# Altium PCB PCB1.pcbdoc
Units mil, origin at the board's own origin, x right, y up, seen from the top; angles counter-clockwise.
Board outline 1070.8 x 1094.5 mil, 2 copper layers (Top Layer, Bottom Layer), stack 62.2 mil thick; 25 components, 18 nets, 96 pads, 48 vias.
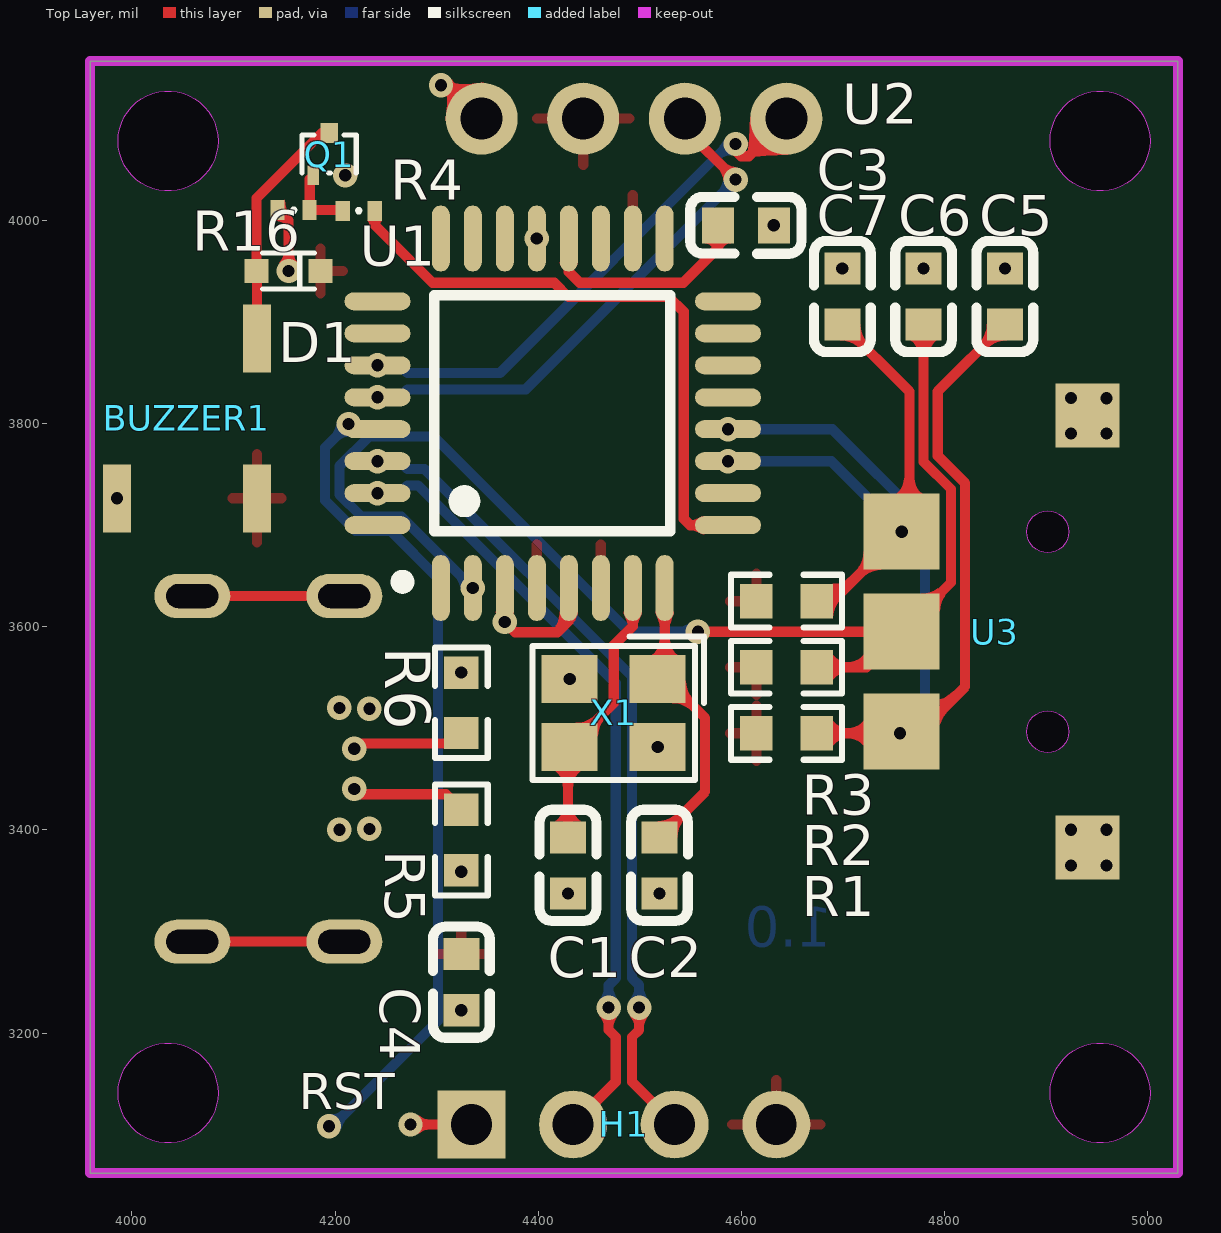
[diagram p0: Top Layer view]
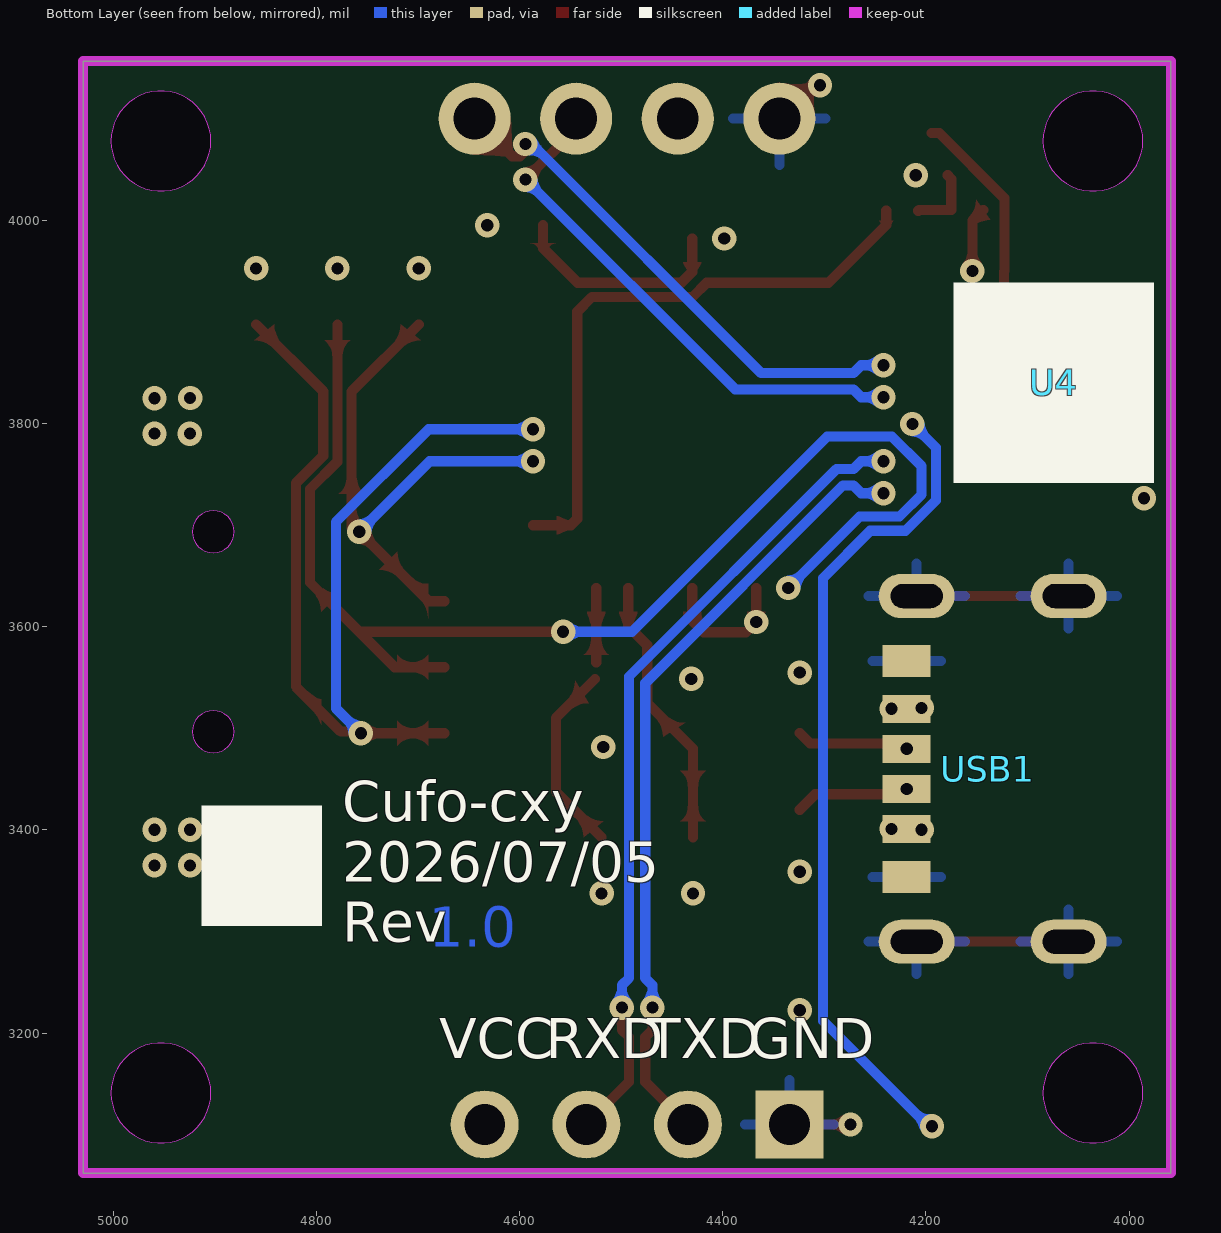
[diagram p1: Bottom Layer view, seen from below]

## Layer stack, top to bottom
Top Solder Mask Layer: solder mask 0.4, Dk 3.3
Top Layer: signal copper 1.4
Dielectric1: surface 59.4, FR4, Dk 4.5
Bottom Layer: signal copper 1.4
Bottom Solder Mask Layer: solder mask 0.4, Dk 3.3

## Board outline
3958.8,4156.7 3958.8,3062.2 5029.6,3062.2 5029.6,4156.7

## Design rules (kind name [scope] priority, off if disabled: settings)
BoardOutlineClearance copperThickness1oz [All] p0: genericclearance=10 ignorepadtopadclearanceinfootprint=FALSE except(0: Arc-SplitContinuation Track-SplitContinuation SMDPad-SplitContinuation THPad-SplitContinuation Via-SplitContinuation Fill-SplitContinuation Poly-SplitContinuation Region-SplitContinuation Text-SplitContinuation)
BoardOutlineClearance copperThickness2oz [All] p0: genericclearance=10 ignorepadtopadclearanceinfootprint=FALSE except(0: Arc-SplitContinuation Track-SplitContinuation SMDPad-SplitContinuation THPad-SplitContinuation Via-SplitContinuation Fill-SplitContinuation Poly-SplitContinuation Region-SplitContinuation Text-SplitContinuation)
BoardOutlineClearance otherClearance [All] p0: genericclearance=10 ignorepadtopadclearanceinfootprint=FALSE except(0: Arc-SplitContinuation Track-SplitContinuation SMDPad-SplitContinuation THPad-SplitContinuation Via-SplitContinuation Fill-SplitContinuation Poly-SplitContinuation Region-SplitContinuation Text-SplitContinuation)
Clearance copperThickness1oz [All] p1: gap=7 ignorepadtopadclearanceinfootprint=FALSE
Clearance copperThickness2oz [All] p1: gap=7 ignorepadtopadclearanceinfootprint=FALSE
Clearance otherClearance [All] p1: gap=7 ignorepadtopadclearanceinfootprint=FALSE
DiffPairsRouting differentialPair [All] p1: maxuncoupledlength=10 minlimit=6 maxlimit=Infinity mostfreqgap=6 toplayer_minwidth=5 toplayer_prefwidth=10 toplayer_maxwidth=100 bottomlayer_minwidth=5 bottomlayer_prefwidth=10 bottomlayer_maxwidth=100
PasteMaskExpansion pasteMaskExpansion [All] p1: expansion=0
PlaneConnect innerPlane [All] p1: planeconnectstyle=Relief reliefexpansion=20 reliefentries=4 reliefconductorwidth=10 reliefairgap=10
PolygonConnect copperRegion [All] p1: connectstyle=Relief reliefentries=4 reliefconductorwidth=10 polygonreliefangle="90 Angle" airgapwidth=10
RoutingVias viaSize [All] p1: viastyle="Through Hole" holewidth=12.0078 minholewidth=11.811 maxholewidth=248.0314 width=12.0078 minwidth=11.811 maxwidth=248.0314
SolderMaskExpansion solderMaskExpansion [IsVia] p1: useseparateexpansions=TRUE expansion=-1000 expansionbottom=-1000
SolderMaskExpansion solderMaskExpansion [All] p2: useseparateexpansions=TRUE expansion=2 expansionbottom=2
Width copperThickness1oz [All] p1: maxlimit=100 minlimit=5 preferedwidth=10
Width copperThickness2oz [All] p1: maxlimit=100 minlimit=8 preferedwidth=10

## Components (designator, comment, footprint, x,y, rotation, side; value= is the part's Value field where it differs from the comment)
BUZZER1 "4kHz" BUZ-SMD_L5.0-W5.5-P4.60 4054.2,3805 r90 top
C1 "22pF" C0603#1 4429.2,3365 r90 top
C2 "22pF" C0603#1 4519.2,3365 r90 top
C3 "100nF" C0603#2 4604.2,3995 r0 top
C4 "100nF" C0603#1 4324.2,3250 r270 top
C5 "100nF" C0603#1 4859.2,3925 r270 top
C6 "100nF" C0603#1 4779.2,3925 r270 top
C7 "100nF" C0603#1 4699.2,3925 r270 top
D1 "1N4148WT" SOD-523_L1.2-W0.8-LS1.6-FD 4154.2,3950 r0 top
H1 "A254UP-ZD04P" HDR-TH_A254UP-ZD04P 4484.2,3110 r0 top
Q1 "2SC5658" SOT-723_L1.2-W0.8-P0.80-LS1.2-BR 4194.2,4065 r270 top
R1 "5.1kΩ" R0603#1 4644.2,3495 r180 top
R2 "5.1kΩ" R0603#1 4644.2,3560 r180 top
R3 "5.1kΩ" R0603#1 4644.2,3625 r180 top
R4 "1K" R0402_无丝印#1 4223.3,4009.4 r180 top
R5 "5.1kΩ" R0603#2 4324.2,3390 r90 top
R6 "5.1kΩ" R0603#2 4324.2,3525 r90 top
R16 "10K" R0402_无丝印#2 4159.2,4010 r0 top
RST "" Test-Point-0.5mm 4194,3108.2 r0 top
U1 "ATMEGA328P-AU" TQFP-32_L7.0-W7.0-P0.80-LS9.0-BL 4414.2,3810 r0 top
U2 "HS96L03W2C03" OLED-TH_L27.8-W27.2-P2.54_C9900033791 4494.2,4100 r0 top
U3 "BL-DT" SW-SMD_BL-DT 4849.2,3595 r270 top
U4 "" JLC-QRCODE-5x5 4074.2,3840 r180 bottom
USB1 "TYPE-C 6P" TYPE-C-SMD_TYPE-C-6P_1 4139.2,3460 r90 bottom
X1 "16MHz" CRYSTAL-SMD_4P-L3.2-W2.5-BL 4474.2,3515 r180 top

## Footprints (in the part's own frame and the unit in brackets; to place one, negate y for a bottom-side part, rotate by r counter-clockwise, add the part's x,y. Pads: shape width x height; smd on the part's side, far side on the other; paste and mask are expansions set on the pad)
BUZ-SMD_L5.0-W5.5-P4.60 [mil]
  rect 66.9x27.6 smd: 1(-78.7,-68.9) 2(78.7,-68.9) 3(-78.7,68.9)
C0603#1 [mil]
  rect 31.5x35.4 smd: 1(-27.6,0) 2(27.6,0)
  silkscreen extent -55,-28 55,28
C0603#2 [mil]
  rect 31.5x35.4 smd: 1(-27.5,0) 2(27.6,0)
  silkscreen extent -55,-28 55,28
CRYSTAL-SMD_4P-L3.2-W2.5-BL [mil]
  rect 55.1x47.2 smd: 1(-43.3,-33.5) 2(43.3,-33.5) 3(43.3,33.5) 4(-43.3,33.5)
  silkscreen extent -89,-75 80,66
HDR-TH_A254UP-ZD04P [mil]
  rect 66.9x66.9 hole 40.2: 1(-150,0)
  round 66.9 hole 40.2: 2(-50,0) 3(50,0) 4(150,0)
JLC-QRCODE-5x5 [mil]
  silkscreen extent -98,-98 98,98
OLED-TH_L27.8-W27.2-P2.54_C9900033791 [mil]
  round 70.9 hole 41.3 paste+0 mask+2: 1(-150,0) 2(-50,0) 3(50,0) 4(150,0)
  Board Outline Layer lines w0.1: -507.9,-959.1 -507.5,-965.2 -506.3,-971.3 -504.4,-977.2 -501.8,-982.8 -498.5,-988 -494.5,-992.7 -490,-997 -485,-1000.6 -479.6,-1003.6 -473.9,-1005.9 -467.9,-1007.4 -461.7,-1008.2 -455.6,-1008.2 -449.4,-1007.4 -443.4,-1005.9 -437.7,-1003.6 -432.3,-1000.6 -427.3,-997 -422.8,-992.7 -418.8,-988 -415.5,-982.8 -412.9,-977.2 -411,-971.3 -409.8,-965.2 -409.4,-959.1 -409.8,-952.9 -411,-946.8 -412.9,-940.9 -415.5,-935.3 -418.8,-930.1 -422.8,-925.4 -427.3,-921.1 -432.3,-917.5 -437.7,-914.5 -443.4,-912.2 -449.4,-910.7 -455.6,-909.9 -461.7,-909.9 -467.9,-910.7 -473.9,-912.2 -479.6,-914.5 -485,-917.5 -490,-921.1 -494.5,-925.4 -498.5,-930.1 -501.8,-935.3 -504.4,-940.9 -506.3,-946.8 -507.5,-952.9 -507.9,-959.1 ; -507.9,-22.1 -507.5,-28.2 -506.3,-34.3 -504.4,-40.2 -501.8,-45.8 -498.5,-51 -494.5,-55.7 -490,-60 -485,-63.6 -479.6,-66.6 -473.9,-68.9 -467.9,-70.4 -461.7,-71.2 -455.6,-71.2 -449.4,-70.4 -443.4,-68.9 -437.7,-66.6 -432.3,-63.6 -427.3,-60 -422.8,-55.7 -418.8,-51 -415.5,-45.8 -412.9,-40.2 -411,-34.3 -409.8,-28.2 -409.4,-22.1 -409.8,-15.9 -411,-9.8 -412.9,-3.9 -415.5,1.7 -418.8,6.9 -422.8,11.6 -427.3,15.9 -432.3,19.5 -437.7,22.5 -443.4,24.8 -449.4,26.3 -455.6,27.1 -461.7,27.1 -467.9,26.3 -473.9,24.8 -479.6,22.5 -485,19.5 -490,15.9 -494.5,11.6 -498.5,6.9 -501.8,1.7 -504.4,-3.9 -506.3,-9.8 -507.5,-15.9 -507.9,-22.1 ; 409.5,-959.1 409.8,-965.2 411,-971.3 412.9,-977.2 415.5,-982.8 418.9,-988 422.8,-992.7 427.3,-997 432.3,-1000.6 437.7,-1003.6 443.5,-1005.9 449.5,-1007.4 455.6,-1008.2 461.8,-1008.2 467.9,-1007.4 473.9,-1005.9 479.6,-1003.6 485,-1000.6 490,-997 494.5,-992.7 498.5,-988 501.8,-982.8 504.4,-977.2 506.3,-971.3 507.5,-965.2 507.9,-959.1 507.5,-952.9 506.3,-946.8 504.4,-940.9 501.8,-935.3 498.5,-930.1 494.5,-925.4 490,-921.1 485,-917.5 479.6,-914.5 473.9,-912.2 467.9,-910.7 461.8,-909.9 455.6,-909.9 449.5,-910.7 443.5,-912.2 437.7,-914.5 432.3,-917.5 427.3,-921.1 422.8,-925.4 418.9,-930.1 415.5,-935.3 412.9,-940.9 411,-946.8 409.8,-952.9 409.5,-959.1 ; 409.5,-22.1 409.8,-28.2 411,-34.3 412.9,-40.2 415.5,-45.8 418.9,-51 422.8,-55.7 427.3,-60 432.3,-63.6 437.7,-66.6 443.5,-68.9 449.5,-70.4 455.6,-71.2 461.8,-71.2 467.9,-70.4 473.9,-68.9 479.6,-66.6 485,-63.6 490,-60 494.5,-55.7 498.5,-51 501.8,-45.8 504.4,-40.2 506.3,-34.3 507.5,-28.2 507.9,-22.1 507.5,-15.9 506.3,-9.8 504.4,-3.9 501.8,1.7 498.5,6.9 494.5,11.6 490,15.9 485,19.5 479.6,22.5 473.9,24.8 467.9,26.3 461.8,27.1 455.6,27.1 449.5,26.3 443.5,24.8 437.7,22.5 432.3,19.5 427.3,15.9 422.8,11.6 418.9,6.9 415.5,1.7 412.9,-3.9 411,-9.8 409.8,-15.9 409.5,-22.1
  Board Outline Layer region: -409.4,-22.1 -409.8,-28.2 -411,-34.3 -412.9,-40.2 -415.5,-45.8 -418.8,-51 -422.8,-55.7 -427.3,-60 -432.3,-63.6 -437.7,-66.6 -443.4,-68.9 -449.4,-70.4 -455.6,-71.2 -461.7,-71.2 -467.9,-70.4 -473.9,-68.9 -479.6,-66.6 -485,-63.6 -490,-60 -494.5,-55.7 -498.5,-51 -501.8,-45.8 -504.4,-40.2 -506.3,-34.3 -507.5,-28.2 -507.9,-22.1 -507.5,-15.9 -506.3,-9.8 -504.4,-3.9 -501.8,1.7 -498.5,6.9 -494.5,11.6 -490,15.9 -485,19.5 -479.6,22.5 -473.9,24.8 -467.9,26.3 -461.7,27.1 -455.6,27.1 -449.4,26.3 -443.4,24.8 -437.7,22.5 -432.3,19.5 -427.3,15.9 -422.8,11.6 -418.8,6.9 -415.5,1.7 -412.9,-3.9 -411,-9.8 -409.8,-15.9
  Board Outline Layer region: -409.4,-22.1 -409.8,-28.2 -411,-34.3 -412.9,-40.2 -415.5,-45.8 -418.8,-51 -422.8,-55.7 -427.3,-60 -432.3,-63.6 -437.7,-66.6 -443.4,-68.9 -449.4,-70.4 -455.6,-71.2 -461.7,-71.2 -467.9,-70.4 -473.9,-68.9 -479.6,-66.6 -485,-63.6 -490,-60 -494.5,-55.7 -498.5,-51 -501.8,-45.8 -504.4,-40.2 -506.3,-34.3 -507.5,-28.2 -507.9,-22.1 -507.5,-15.9 -506.3,-9.8 -504.4,-3.9 -501.8,1.7 -498.5,6.9 -494.5,11.6 -490,15.9 -485,19.5 -479.6,22.5 -473.9,24.8 -467.9,26.3 -461.7,27.1 -455.6,27.1 -449.4,26.3 -443.4,24.8 -437.7,22.5 -432.3,19.5 -427.3,15.9 -422.8,11.6 -418.8,6.9 -415.5,1.7 -412.9,-3.9 -411,-9.8 -409.8,-15.9
  Board Outline Layer region: 507.9,-22.1 507.5,-28.2 506.3,-34.3 504.4,-40.2 501.8,-45.8 498.5,-51 494.5,-55.7 490,-60 485,-63.6 479.6,-66.6 473.9,-68.9 467.9,-70.4 461.8,-71.2 455.6,-71.2 449.5,-70.4 443.5,-68.9 437.7,-66.6 432.3,-63.6 427.3,-60 422.8,-55.7 418.9,-51 415.5,-45.8 412.9,-40.2 411,-34.3 409.8,-28.2 409.5,-22.1 409.8,-15.9 411,-9.8 412.9,-3.9 415.5,1.7 418.9,6.9 422.8,11.6 427.3,15.9 432.3,19.5 437.7,22.5 443.5,24.8 449.5,26.3 455.6,27.1 461.8,27.1 467.9,26.3 473.9,24.8 479.6,22.5 485,19.5 490,15.9 494.5,11.6 498.5,6.9 501.8,1.7 504.4,-3.9 506.3,-9.8 507.5,-15.9
  Board Outline Layer region: 507.9,-22.1 507.5,-28.2 506.3,-34.3 504.4,-40.2 501.8,-45.8 498.5,-51 494.5,-55.7 490,-60 485,-63.6 479.6,-66.6 473.9,-68.9 467.9,-70.4 461.8,-71.2 455.6,-71.2 449.5,-70.4 443.5,-68.9 437.7,-66.6 432.3,-63.6 427.3,-60 422.8,-55.7 418.9,-51 415.5,-45.8 412.9,-40.2 411,-34.3 409.8,-28.2 409.5,-22.1 409.8,-15.9 411,-9.8 412.9,-3.9 415.5,1.7 418.9,6.9 422.8,11.6 427.3,15.9 432.3,19.5 437.7,22.5 443.5,24.8 449.5,26.3 455.6,27.1 461.8,27.1 467.9,26.3 473.9,24.8 479.6,22.5 485,19.5 490,15.9 494.5,11.6 498.5,6.9 501.8,1.7 504.4,-3.9 506.3,-9.8 507.5,-15.9
  Board Outline Layer region: -409.4,-959.1 -409.8,-965.2 -411,-971.3 -412.9,-977.2 -415.5,-982.8 -418.8,-988 -422.8,-992.7 -427.3,-997 -432.3,-1000.6 -437.7,-1003.6 -443.4,-1005.9 -449.4,-1007.4 -455.6,-1008.2 -461.7,-1008.2 -467.9,-1007.4 -473.9,-1005.9 -479.6,-1003.6 -485,-1000.6 -490,-997 -494.5,-992.7 -498.5,-988 -501.8,-982.8 -504.4,-977.2 -506.3,-971.3 -507.5,-965.2 -507.9,-959.1 -507.5,-952.9 -506.3,-946.8 -504.4,-940.9 -501.8,-935.3 -498.5,-930.1 -494.5,-925.4 -490,-921.1 -485,-917.5 -479.6,-914.5 -473.9,-912.2 -467.9,-910.7 -461.7,-909.9 -455.6,-909.9 -449.4,-910.7 -443.4,-912.2 -437.7,-914.5 -432.3,-917.5 -427.3,-921.1 -422.8,-925.4 -418.8,-930.1 -415.5,-935.3 -412.9,-940.9 -411,-946.8 -409.8,-952.9
  Board Outline Layer region: -409.4,-959.1 -409.8,-965.2 -411,-971.3 -412.9,-977.2 -415.5,-982.8 -418.8,-988 -422.8,-992.7 -427.3,-997 -432.3,-1000.6 -437.7,-1003.6 -443.4,-1005.9 -449.4,-1007.4 -455.6,-1008.2 -461.7,-1008.2 -467.9,-1007.4 -473.9,-1005.9 -479.6,-1003.6 -485,-1000.6 -490,-997 -494.5,-992.7 -498.5,-988 -501.8,-982.8 -504.4,-977.2 -506.3,-971.3 -507.5,-965.2 -507.9,-959.1 -507.5,-952.9 -506.3,-946.8 -504.4,-940.9 -501.8,-935.3 -498.5,-930.1 -494.5,-925.4 -490,-921.1 -485,-917.5 -479.6,-914.5 -473.9,-912.2 -467.9,-910.7 -461.7,-909.9 -455.6,-909.9 -449.4,-910.7 -443.4,-912.2 -437.7,-914.5 -432.3,-917.5 -427.3,-921.1 -422.8,-925.4 -418.8,-930.1 -415.5,-935.3 -412.9,-940.9 -411,-946.8 -409.8,-952.9
  Board Outline Layer region: 507.9,-959.1 507.5,-965.2 506.3,-971.3 504.4,-977.2 501.8,-982.8 498.5,-988 494.5,-992.7 490,-997 485,-1000.6 479.6,-1003.6 473.9,-1005.9 467.9,-1007.4 461.8,-1008.2 455.6,-1008.2 449.5,-1007.4 443.5,-1005.9 437.7,-1003.6 432.3,-1000.6 427.3,-997 422.8,-992.7 418.9,-988 415.5,-982.8 412.9,-977.2 411,-971.3 409.8,-965.2 409.5,-959.1 409.8,-952.9 411,-946.8 412.9,-940.9 415.5,-935.3 418.9,-930.1 422.8,-925.4 427.3,-921.1 432.3,-917.5 437.7,-914.5 443.5,-912.2 449.5,-910.7 455.6,-909.9 461.8,-909.9 467.9,-910.7 473.9,-912.2 479.6,-914.5 485,-917.5 490,-921.1 494.5,-925.4 498.5,-930.1 501.8,-935.3 504.4,-940.9 506.3,-946.8 507.5,-952.9
  Board Outline Layer region: 507.9,-959.1 507.5,-965.2 506.3,-971.3 504.4,-977.2 501.8,-982.8 498.5,-988 494.5,-992.7 490,-997 485,-1000.6 479.6,-1003.6 473.9,-1005.9 467.9,-1007.4 461.8,-1008.2 455.6,-1008.2 449.5,-1007.4 443.5,-1005.9 437.7,-1003.6 432.3,-1000.6 427.3,-997 422.8,-992.7 418.9,-988 415.5,-982.8 412.9,-977.2 411,-971.3 409.8,-965.2 409.5,-959.1 409.8,-952.9 411,-946.8 412.9,-940.9 415.5,-935.3 418.9,-930.1 422.8,-925.4 427.3,-921.1 432.3,-917.5 437.7,-914.5 443.5,-912.2 449.5,-910.7 455.6,-909.9 461.8,-909.9 467.9,-910.7 473.9,-912.2 479.6,-914.5 485,-917.5 490,-921.1 494.5,-925.4 498.5,-930.1 501.8,-935.3 504.4,-940.9 506.3,-946.8 507.5,-952.9
  Multi-Layer board cut-out: -409.4,-22.1 -409.8,-28.2 -411,-34.3 -412.9,-40.2 -415.5,-45.8 -418.8,-51 -422.8,-55.7 -427.3,-60 -432.3,-63.6 -437.7,-66.6 -443.4,-68.9 -449.4,-70.4 -455.6,-71.2 -461.7,-71.2 -467.9,-70.4 -473.9,-68.9 -479.6,-66.6 -485,-63.6 -490,-60 -494.5,-55.7 -498.5,-51 -501.8,-45.8 -504.4,-40.2 -506.3,-34.3 -507.5,-28.2 -507.9,-22.1 -507.5,-15.9 -506.3,-9.8 -504.4,-3.9 -501.8,1.7 -498.5,6.9 -494.5,11.6 -490,15.9 -485,19.5 -479.6,22.5 -473.9,24.8 -467.9,26.3 -461.7,27.1 -455.6,27.1 -449.4,26.3 -443.4,24.8 -437.7,22.5 -432.3,19.5 -427.3,15.9 -422.8,11.6 -418.8,6.9 -415.5,1.7 -412.9,-3.9 -411,-9.8 -409.8,-15.9
  Multi-Layer board cut-out: 507.9,-22.1 507.5,-28.2 506.3,-34.3 504.4,-40.2 501.8,-45.8 498.5,-51 494.5,-55.7 490,-60 485,-63.6 479.6,-66.6 473.9,-68.9 467.9,-70.4 461.8,-71.2 455.6,-71.2 449.5,-70.4 443.5,-68.9 437.7,-66.6 432.3,-63.6 427.3,-60 422.8,-55.7 418.9,-51 415.5,-45.8 412.9,-40.2 411,-34.3 409.8,-28.2 409.5,-22.1 409.8,-15.9 411,-9.8 412.9,-3.9 415.5,1.7 418.9,6.9 422.8,11.6 427.3,15.9 432.3,19.5 437.7,22.5 443.5,24.8 449.5,26.3 455.6,27.1 461.8,27.1 467.9,26.3 473.9,24.8 479.6,22.5 485,19.5 490,15.9 494.5,11.6 498.5,6.9 501.8,1.7 504.4,-3.9 506.3,-9.8 507.5,-15.9
  Multi-Layer board cut-out: -409.4,-959.1 -409.8,-965.2 -411,-971.3 -412.9,-977.2 -415.5,-982.8 -418.8,-988 -422.8,-992.7 -427.3,-997 -432.3,-1000.6 -437.7,-1003.6 -443.4,-1005.9 -449.4,-1007.4 -455.6,-1008.2 -461.7,-1008.2 -467.9,-1007.4 -473.9,-1005.9 -479.6,-1003.6 -485,-1000.6 -490,-997 -494.5,-992.7 -498.5,-988 -501.8,-982.8 -504.4,-977.2 -506.3,-971.3 -507.5,-965.2 -507.9,-959.1 -507.5,-952.9 -506.3,-946.8 -504.4,-940.9 -501.8,-935.3 -498.5,-930.1 -494.5,-925.4 -490,-921.1 -485,-917.5 -479.6,-914.5 -473.9,-912.2 -467.9,-910.7 -461.7,-909.9 -455.6,-909.9 -449.4,-910.7 -443.4,-912.2 -437.7,-914.5 -432.3,-917.5 -427.3,-921.1 -422.8,-925.4 -418.8,-930.1 -415.5,-935.3 -412.9,-940.9 -411,-946.8 -409.8,-952.9
  Multi-Layer board cut-out: 507.9,-959.1 507.5,-965.2 506.3,-971.3 504.4,-977.2 501.8,-982.8 498.5,-988 494.5,-992.7 490,-997 485,-1000.6 479.6,-1003.6 473.9,-1005.9 467.9,-1007.4 461.8,-1008.2 455.6,-1008.2 449.5,-1007.4 443.5,-1005.9 437.7,-1003.6 432.3,-1000.6 427.3,-997 422.8,-992.7 418.9,-988 415.5,-982.8 412.9,-977.2 411,-971.3 409.8,-965.2 409.5,-959.1 409.8,-952.9 411,-946.8 412.9,-940.9 415.5,-935.3 418.9,-930.1 422.8,-925.4 427.3,-921.1 432.3,-917.5 437.7,-914.5 443.5,-912.2 449.5,-910.7 455.6,-909.9 461.8,-909.9 467.9,-910.7 473.9,-912.2 479.6,-914.5 485,-917.5 490,-921.1 494.5,-925.4 498.5,-930.1 501.8,-935.3 504.4,-940.9 506.3,-946.8 507.5,-952.9
R0402_无丝印#1 [mil]
  rect 13.8x19.7 smd: 1(-15.7,0.1) 2(15.8,0.1)
  silkscreen extent -2,-2 2,2
R0402_无丝印#2 [mil]
  rect 13.8x19.7 smd: 1(-15.7,0.2) 2(15.8,0.2)
  silkscreen extent -2,-2 2,2
R0603#1 [mil]
  rect 31.8x34 smd paste-3937 mask+2: 1(-29.7,0) 2(29.6,0)
  silkscreen extent -54,-26 54,26
R0603#2 [mil]
  rect 31.8x34 smd paste-3937 mask+2: 1(-29.7,0) 2(29.7,0)
  silkscreen extent -54,-26 54,26
SOD-523_L1.2-W0.8-LS1.6-FD [mil]
  rect 23.6x23.6 smd: 1(-31.5,0) 2(31.5,0)
  silkscreen extent -26,-18 26,18
SOT-723_L1.2-W0.8-P0.80-LS1.2-BR [mil]
  rect 19.3x11.6 smd: 1(20.8,-15.7) 2(20.8,15.8)
  rect 19.3x17.1 smd: 3(-20.8,0)
  silkscreen extent -19,-27 19,27
SW-SMD_BL-DT [mil]
  rect 63x63 smd paste+0 mask+2: A(-212.6,91.5) A(212.6,91.5)
  rect 74.8x74.8 smd paste+0 mask+2: B(98.4,-91.5) C(0,-91.5) D(-98.4,-91.5)
  Board Outline Layer lines w0.1: 98.4,31.5 102.5,31.9 106.3,33.1 109.9,35 113,37.6 115.6,40.7 117.5,44.3 118.7,48.1 119.1,52.2 118.7,56.2 117.5,60.1 115.6,63.7 113,66.8 109.9,69.4 106.3,71.3 102.5,72.4 98.4,72.8 94.4,72.4 90.5,71.3 86.9,69.4 83.8,66.8 81.2,63.7 79.3,60.1 78.2,56.2 77.8,52.2 78.2,48.1 79.3,44.3 81.2,40.7 83.8,37.6 86.9,35 90.5,33.1 94.4,31.9 98.4,31.5 ; -98.4,31.5 -94.4,31.9 -90.5,33.1 -86.9,35 -83.8,37.6 -81.2,40.7 -79.3,44.3 -78.1,48.1 -77.8,52.2 -78.1,56.2 -79.3,60.1 -81.2,63.7 -83.8,66.8 -86.9,69.4 -90.5,71.3 -94.4,72.4 -98.4,72.8 -102.5,72.4 -106.3,71.3 -109.9,69.4 -113,66.8 -115.6,63.7 -117.5,60.1 -118.7,56.2 -119.1,52.2 -118.7,48.1 -117.5,44.3 -115.6,40.7 -113,37.6 -109.9,35 -106.3,33.1 -102.5,31.9 -98.4,31.5
  Board Outline Layer region: -77.8,52.2 -78.1,48.1 -79.3,44.3 -81.2,40.7 -83.8,37.6 -86.9,35 -90.5,33.1 -94.4,31.9 -98.4,31.5 -102.5,31.9 -106.3,33.1 -109.9,35 -113,37.6 -115.6,40.7 -117.5,44.3 -118.7,48.1 -119.1,52.2 -118.7,56.2 -117.5,60.1 -115.6,63.7 -113,66.8 -109.9,69.4 -106.3,71.3 -102.5,72.4 -98.4,72.8 -94.4,72.4 -90.5,71.3 -86.9,69.4 -83.8,66.8 -81.2,63.7 -79.3,60.1 -78.1,56.2
  Board Outline Layer region: -77.8,52.2 -78.1,48.1 -79.3,44.3 -81.2,40.7 -83.8,37.6 -86.9,35 -90.5,33.1 -94.4,31.9 -98.4,31.5 -102.5,31.9 -106.3,33.1 -109.9,35 -113,37.6 -115.6,40.7 -117.5,44.3 -118.7,48.1 -119.1,52.2 -118.7,56.2 -117.5,60.1 -115.6,63.7 -113,66.8 -109.9,69.4 -106.3,71.3 -102.5,72.4 -98.4,72.8 -94.4,72.4 -90.5,71.3 -86.9,69.4 -83.8,66.8 -81.2,63.7 -79.3,60.1 -78.1,56.2
  Board Outline Layer region: 119.1,52.2 118.7,48.1 117.5,44.3 115.6,40.7 113,37.6 109.9,35 106.3,33.1 102.5,31.9 98.4,31.5 94.4,31.9 90.5,33.1 86.9,35 83.8,37.6 81.2,40.7 79.3,44.3 78.2,48.1 77.8,52.2 78.2,56.2 79.3,60.1 81.2,63.7 83.8,66.8 86.9,69.4 90.5,71.3 94.4,72.4 98.4,72.8 102.5,72.4 106.3,71.3 109.9,69.4 113,66.8 115.6,63.7 117.5,60.1 118.7,56.2
  Board Outline Layer region: 119.1,52.2 118.7,48.1 117.5,44.3 115.6,40.7 113,37.6 109.9,35 106.3,33.1 102.5,31.9 98.4,31.5 94.4,31.9 90.5,33.1 86.9,35 83.8,37.6 81.2,40.7 79.3,44.3 78.2,48.1 77.8,52.2 78.2,56.2 79.3,60.1 81.2,63.7 83.8,66.8 86.9,69.4 90.5,71.3 94.4,72.4 98.4,72.8 102.5,72.4 106.3,71.3 109.9,69.4 113,66.8 115.6,63.7 117.5,60.1 118.7,56.2
  Multi-Layer board cut-out: -77.8,52.2 -78.1,48.1 -79.3,44.3 -81.2,40.7 -83.8,37.6 -86.9,35 -90.5,33.1 -94.4,31.9 -98.4,31.5 -102.5,31.9 -106.3,33.1 -109.9,35 -113,37.6 -115.6,40.7 -117.5,44.3 -118.7,48.1 -119.1,52.2 -118.7,56.2 -117.5,60.1 -115.6,63.7 -113,66.8 -109.9,69.4 -106.3,71.3 -102.5,72.4 -98.4,72.8 -94.4,72.4 -90.5,71.3 -86.9,69.4 -83.8,66.8 -81.2,63.7 -79.3,60.1 -78.1,56.2
  Multi-Layer board cut-out: 119.1,52.2 118.7,48.1 117.5,44.3 115.6,40.7 113,37.6 109.9,35 106.3,33.1 102.5,31.9 98.4,31.5 94.4,31.9 90.5,33.1 86.9,35 83.8,37.6 81.2,40.7 79.3,44.3 78.2,48.1 77.8,52.2 78.2,56.2 79.3,60.1 81.2,63.7 83.8,66.8 86.9,69.4 90.5,71.3 94.4,72.4 98.4,72.8 102.5,72.4 106.3,71.3 109.9,69.4 113,66.8 115.6,63.7 117.5,60.1 118.7,56.2
Test-Point-0.5mm [mil]
  round 23.6 smd: 1(0,0)
TQFP-32_L7.0-W7.0-P0.80-LS9.0-BL [mil]
  oval 17.7x65 smd: 1(-110.2,-172) 2(-78.7,-172) 3(-47.2,-172) 4(-15.7,-172) 5(15.8,-172) 6(47.3,-172) 7(78.8,-172) 8(110.2,-172) 17(110.2,172) 18(78.8,172) 19(47.3,172) 20(15.8,172) 21(-15.7,172) 22(-47.2,172) 23(-78.7,172) 24(-110.2,172)
  oval 65x17.7 smd: 9(172.5,-110.2) 10(172.5,-78.7) 11(172.5,-47.2) 12(172.5,-15.7) 13(172.5,15.7) 14(172.5,47.2) 15(172.5,78.7) 16(172.5,110.2) 25(-172.5,110.2) 26(-172.5,78.7) 27(-172.5,47.2) 28(-172.5,15.7) 29(-172.5,-15.7) 30(-172.5,-47.2) 31(-172.5,-78.7) 32(-172.5,-110.2)
  silkscreen extent -154,-172 116,116
TYPE-C-SMD_TYPE-C-6P_1 [mil]
  oval 43.3x74.8 hole 23.6 slot 51.2 at 90 deg: 7(-170.1,-79.7) 7(-170.1,69.9) 7(170.1,-79.7) 7(170.1,69.9)
  rect 27.6x47.2 smd paste-3937 mask+2: A5(-19.7,79.7) A9(59.1,79.7) B5(19.7,79.7) B9(-59.1,79.7)
  rect 31.5x47.2 smd paste-3937 mask+2: A12(106.3,79.7) B12(-106.3,79.7)

## Via types
v1: diameter 24, hole 12, Top Layer to Bottom Layer, 48 vias

## Nets (pads, with @x,y where several pads share a name; then routed paths per layer and width w, separated by ;. In a path a pad name is that pad's centre, name@x,y a point inside that pad or via, vN(x,y) a via of type N, cw(c..) or ccw(c..) an arc to the next point about the centre after c; other vN are vias at no path point)
$1N483: C1.2 U1.7 X1.3 | length 271.8
  Top Layer w10: C1.2 4429.2,3479.8 X1.3 4474.2,3524.8 4474.2,3581.6 4493,3600.4 U1.7
$1N620: C2.2 U1.8 X1.1 | length 263.6
  Top Layer w10: C2.2 4564.2,3437.6 4564.2,3510 X1.1@4525.7,3548.5 ; X1.1@4524.4,3564.9 U1.8
$1N1022: C3.1 U1.20 | length 220.5
  Top Layer w10: U1.20 4430,3949.3 4440.7,3938.5 4542.7,3938.5 4576.7,3972.4 C3.1
$1N1538: R5.2 USB1.A5 | length 113.8
  Top Layer w10: v1(4218.9,3440.3) 4224.3,3435 4308.9,3435 R5.2
$1N1540: R6.1 USB1.B5 | length 111.7
  Top Layer w10: v1(4218.9,3479.7) 4224.3,3485 4313.9,3485 R6.1
$1N1542: RST.1 U1.29 | length 813.4
  Bottom Layer w10: v1(4194,3108.2) 4197.4,3108.2 4301.2,3212 4301.2,3647.7 4254.7,3694.3 4220.1,3694.3 4190.2,3724.2 4190.2,3776.3 v1(4213.3,3799.4)
$1N1551: Q1.1 R4.2 R16.2 | length 68.3
  Top Layer w10: Q1.1 4175,4040.6 R16.2 4206.6,4010.2 R4.2
$1N1554: BUZZER1.2 D1.1 Q1.3 | length 236.2
  Top Layer w10: BUZZER1.2 4123.1,3949.6 D1.1 4122.7,4021.7 4186.9,4085.8 Q1.3
+5V: BUZZER1.1 C4.1 D1.2 H1.4 R1.2 R2.2 R3.2 U1.4 U1.6 U1.18 U2.2 USB1.A9 USB1.B9
  other v1: 4204.2,3400 4233.7,3400.9 4233.7,3519.1 4204.2,3520
BUZZER: R4.1 U1.9 | length 603.6
  Top Layer w10: R4.1 4239,3995.3 4295.8,3938.5 4415.7,3938.5 4429.7,3924.5 4528.7,3924.5 4543.2,3910 4543.2,3706 4549.4,3699.8 U1.9
GND: BUZZER1.3 C1.1 C2.1 C3.2 C4.2 C5.1 C6.1 C7.1 H1.1 Q1.2 R5.1 R6.2 R16.1 U1.3 U1.5 U1.21 U2.1 U3.A USB1.7 USB1.A12 USB1.B12 X1.2 X1.4 | length 615.3
  Top Layer w10: USB1.7@4059.5,3289.9 USB1.7@4209.1,3289.9 ; USB1.7@4059.5,3630.1 USB1.7@4209.1,3630.1 ; R16.1 4154.2,3999.4 v1(4154.2,3950) ; v1(4274.2,3110) H1.1 ; v1@4304.2,4133.6 4310.6,4133.6 U2.1 ; U1.3 v1(4367,3604.5) 4377,3594.5 4418.7,3594.5 4430,3605.7 U1.5
  other v1: 4324.2,3222.4 4429.2,3337.4 4519.2,3337.4 4324.2,3358.7 4924.2,3365 4959.2,3365 4924.2,3400 4959.2,3400 4517.5,3481.5 4430.9,3548.5 4324.2,3554.7 3985.3,3726.3 4924.4,3790 4959.2,3790 4924.2,3825 4959.2,3824.7 4699.2,3952.6 4779.2,3952.6 4859.2,3952.6 4398.5,3982 4631.8,3995 4210,4044.2 4304.2,4132.9
PIN_DOWN: C5.2 R1.1 U1.12 U3.B | length 1010.2
  Top Layer w10: R1.1 v1(4756.1,3495) U3.B 4775.8,3496.6 4820.1,3540.9 4820.1,3741.2 4793.2,3768 4793.2,3831.5 C5.2
  Bottom Layer w10: v1(4586.7,3794.3) 4689.4,3794.3 4780.7,3702.9 4780.7,3519.6 v1(4756.1,3495)
PIN_OK: C6.2 R2.1 U1.2 U3.C | length 1272.9
  Top Layer w10: v1@4558.5,3595 U3.C ; R2.1 4722.7,3560 U3.C ; C6.2 4779.2,3762.2 4806.1,3735.4 4806.1,3643.4 U3.C
  Bottom Layer w10: v1(4335.5,3638) 4265.2,3708.3 4225.9,3708.3 4204.2,3730 4204.2,3757.8 4233.5,3787.1 4297.1,3787.1 4489.2,3595 v1(4557.1,3595)
PIN_UP: C7.2 R3.1 U1.11 U3.D | length 546.4
  Top Layer w10: R3.1 4689.3,3625 v1(4757.7,3693.4) 4765.2,3700.9 4765.2,3831.5 C7.2
  Bottom Layer w10: v1(4586.7,3762.8) 4688.3,3762.8 v1(4757.7,3693.4)
RXD: H1.3 U1.30 | length 802.4
  Top Layer w10: v1(4499.2,3225) 4499.2,3203 4492.2,3196 4492.2,3152 H1.3
  Bottom Layer w10: v1(4241.7,3762.8) 4263.7,3762.8 4271.5,3755 4288.1,3755 4492.2,3550.9 4492.2,3254 4499.2,3247 v1(4499.2,3225)
SCL: U1.28 U2.3 | length 522
  Top Layer w10: U2.3 4544.2,4090 v1(4594.2,4040)
  Bottom Layer w10: v1(4241.7,3825.7) 4263.7,3825.7 4271.5,3833.5 4387.7,3833.5 v1(4594.2,4040)
SDA: U1.27 U2.4 | length 523.2
  Top Layer w10: v1(4594.2,4075) 4594.2,4068.4 4599.6,4063 4607.2,4063 U2.4
  Bottom Layer w10: v1(4241.7,3857.2) 4263.7,3857.2 4271.5,3849.5 4362.1,3849.5 4587.6,4075 v1(4594.2,4075)
TXD: H1.2 U1.31 | length 775.8
  Top Layer w10: H1.2 4476.2,3152 4476.2,3196 4469.2,3203 v1(4469.2,3225)
  Bottom Layer w10: v1(4241.7,3731.3) 4263.7,3731.3 4271.5,3739 4281.5,3739 4476.2,3544.3 4476.2,3254 4469.2,3247 v1(4469.2,3225)
pads on no net: U1.1 U1.10 U1.13 U1.14 U1.15 U1.16 U1.17 U1.19 U1.22 U1.23 U1.24 U1.25 U1.26 U1.32

## Polygon pours and split planes (outlines as drawn)
+5V on Top Layer (solid, remove dead copper, pour order 0): 3929.2,4175 3929.2,3010 5069.2,3010 5069.2,4175
GND on Bottom Layer (solid, remove dead copper, pour order 2): 3929.2,4215 3929.2,3000 5119.2,3000 5119.2,4215

## Keep-outs
Board Outline Layer:
  the board outline again, w10

## Other copper
Top Layer:
  region net $1N483: 4424.2,3423.3 4434.2,3423.3 4434.5,3419.9 4435.5,3416.5 4437,3413.4 4439.1,3410.6 4441.7,3408.3 4416.7,3408.3 4419.3,3410.6 4421.4,3413.4 4422.9,3416.5 4423.9,3419.9 4424.2,3423.3
  region net $1N620: 4533.2,3413.6 4542.2,3408.5 4540,3404.9 4538.3,3401 4537.3,3396.8 4536.9,3392.6 4517.3,3408.3 4521.5,3408.7 4525.7,3409.7 4529.6,3411.3 4533.2,3413.6
  region net $1N1022: 4581.7,3972.4 4571.7,3972.4 4570.4,3974.4 4568.6,3976 4566.5,3976.9 4564.2,3977.3 4589.2,3977.3 4586.8,3976.9 4584.7,3976 4582.9,3974.4 4581.7,3972.4
  region net PIN_DOWN: 4845.2,3876.4 4836.2,3881.5 4838.5,3885.1 4840.1,3889 4841.2,3893.2 4841.5,3897.4 4861.1,3881.7 4856.9,3881.3 4852.8,3880.3 4848.8,3878.7 4845.2,3876.4
  region net PIN_OK: 4784.2,3866.7 4774.2,3866.7 4773.9,3870.1 4772.9,3873.5 4771.4,3876.6 4769.3,3879.4 4766.7,3881.7 4791.7,3881.7 4789.1,3879.4 4787,3876.6 4785.5,3873.5 4784.5,3870.1 4784.2,3866.7
  region net PIN_UP: 4722.2,3881.5 4713.2,3876.4 4709.6,3878.7 4705.7,3880.3 4701.5,3881.3 4697.3,3881.7 4716.9,3897.4 4717.3,3893.2 4718.3,3889 4720,3885.1 4722.2,3881.5
  region net PIN_DOWN: 4704.7,3500 4704.7,3490 4701.3,3489.7 4698,3488.7 4694.8,3487.2 4692.1,3485.1 4689.7,3482.5 4689.7,3507.5 4692.1,3504.9 4694.8,3502.8 4698,3501.3 4701.3,3500.3 4704.7,3500
  region net PIN_OK: 4704.7,3565 4704.7,3555 4701.3,3554.7 4698,3553.7 4694.8,3552.2 4692.1,3550.1 4689.7,3547.5 4689.7,3572.5 4692.1,3569.9 4694.8,3567.8 4698,3566.3 4701.3,3565.3 4704.7,3565
  region net PIN_UP: 4705.1,3647.9 4695.1,3623.8 4692.8,3620.2 4691.1,3616.3 4690.1,3612.2 4689.7,3608 4689.7,3642 4693.1,3642.1 4696.4,3642.8 4699.6,3644 4702.5,3645.7 4705.1,3647.9
  region net BUZZER: 4244,3995.3 4234,3995.3 4233.8,3996.8 4233.1,3998.2 4232.1,3999.4 4245.9,3999.4 4244.9,3998.2 4244.2,3996.8 4244,3995.3
  region net GND: 4156.1,4004.6 4150.7,3995.9 4147.4,3997.8 4144,3999.2 4140.3,4000.1 4136.6,4000.4 4150.4,4020 4150.7,4015.9 4151.8,4011.8 4153.7,4008 4156.1,4004.6
  region net $1N1022: 4435,3949.3 4425,3949.3 4424.8,3950.6 4424.4,3951.9 4423,3954.4 4421.7,3956.6 4421.3,3957.6 4421.1,3958.4 4438.8,3958.4 4438.7,3957.6 4438.2,3956.6 4436.9,3954.4 4435.6,3951.9 4435.1,3950.6
  region net BUZZER: 4549.4,3694.8 4549.4,3704.8 4551.5,3704.9 4553.5,3705.4 4557.3,3706.7 4560.5,3708 4561.9,3708.5 4563.1,3708.6 4563.1,3690.9 4561.9,3691.1 4560.5,3691.5 4557.3,3692.8 4553.5,3694.2 4551.5,3694.6
  region net $1N620: 4529.4,3599.4 4519.4,3599.4 4519.3,3601.6 4518.8,3603.8 4517.5,3608 4516.2,3611.6 4515.8,3613.1 4515.6,3614.4 4533.3,3614.4 4533.1,3613.1 4532.7,3611.6 4531.4,3608 4530.1,3603.8 4529.6,3601.6
  region net $1N483: 4498,3600.4 4488,3600.4 4487.8,3602.4 4487.3,3604.5 4486,3608.4 4484.7,3611.7 4484.3,3613.2 4484.1,3614.4 4501.8,3614.4 4501.6,3613.2 4501.2,3611.7 4499.9,3608.4 4498.6,3604.5 4498.1,3602.4
  region net GND: 4431.6,3600.4 4415.7,3598.6 4416.7,3599.8 4417.7,3601.4 4418.6,3603.4 4419.4,3605.5 4420.1,3607.8 4420.6,3610.1 4421,3612.3 4421.1,3614.4 4438.8,3614.4 4438.7,3612.9 4438.2,3611.2 4437.5,3609.4 4436.6,3607.4 4434.3,3603.6 4433,3601.8
  region net GND: 4372,3604.5 4362,3604.5 4361.8,3606 4361.4,3607.4 4360,3610.1 4358.7,3612.5 4358.3,3613.5 4358.1,3614.4 4375.8,3614.4 4375.7,3613.5 4375.2,3612.5 4373.9,3610.1 4372.6,3607.4 4372.1,3606
  region net PIN_UP: 4722,3650.7 4715,3657.8 4717.2,3661.4 4718.9,3665.3 4719.9,3669.4 4720.3,3673.7 4738,3656 4733.7,3655.7 4729.6,3654.7 4725.6,3653 4722,3650.7
  region net PIN_UP: 4760.2,3745.8 4770.2,3745.8 4770.5,3742.4 4771.5,3739 4773,3735.9 4775.1,3733.2 4777.7,3730.8 4752.7,3730.8 4755.3,3733.2 4757.4,3735.9 4758.9,3739 4759.9,3742.4 4760.2,3745.8
  region net PIN_OK: 4705.3,3555 4705.3,3565 4708.7,3565.3 4712.1,3566.3 4715.2,3567.8 4717.9,3569.9 4720.3,3572.5 4720.3,3557.6 4715.2,3557.3 4710.2,3556.4 4705.3,3555
  region net PIN_OK: 4793.3,3637.7 4800.4,3630.6 4798.1,3627 4796.4,3623.1 4795.4,3619 4795.1,3614.7 4777.4,3632.4 4781.6,3632.7 4785.8,3633.8 4789.7,3635.4 4793.3,3637.7
  region net PIN_DOWN: 4705.3,3490 4705.3,3500 4708.7,3500.3 4712.1,3501.3 4715.2,3502.8 4717.9,3504.9 4720.3,3507.5 4720.3,3482.5 4717.9,3485.1 4715.2,3487.2 4712.1,3488.7 4708.7,3489.7 4705.3,3490
  region net PIN_DOWN: 4808.4,3536.3 4803,3516.7 4800.4,3513.8 4798.2,3510.5 4796.4,3507 4795.1,3503.4 4795.1,3528.4 4798.8,3529.7 4802.2,3531.5 4805.5,3533.7 4808.4,3536.3
  region net $1N620: 4519.4,3587.1 4529.4,3587.1 4529.8,3583.6 4530.7,3580.3 4532.3,3577.2 4534.4,3574.4 4536.9,3572.1 4511.9,3572.1 4514.5,3574.4 4516.6,3577.2 4518.2,3580.3 4519.1,3583.6 4519.4,3587.1
  region net $1N620: 4550.4,3530.9 4547.6,3519.5 4544,3521.8 4540.1,3523.5 4535.9,3524.5 4531.7,3524.8 4545.1,3546.8 4545.4,3542.6 4546.4,3538.4 4548.1,3534.5 4550.4,3530.9
  region net $1N483: 4434.2,3442.9 4424.2,3442.9 4423.9,3446.4 4422.9,3449.7 4421.4,3452.8 4419.3,3455.6 4416.7,3457.9 4441.7,3457.9 4439.1,3455.6 4437,3452.8 4435.5,3449.7 4434.5,3446.4 4434.2,3442.9
  region net $1N483: 4452.8,3510.5 4463.8,3507.3 4461.5,3503.7 4459.8,3499.8 4458.8,3495.7 4458.5,3491.4 4436.8,3505.2 4441.1,3505.5 4445.2,3506.5 4449.2,3508.2 4452.8,3510.5
  region net GND: 4307.1,4130.1 4314.1,4137.1 4315.5,4136 4317.2,4135.1 4319.1,4134.5 4321.1,4134.1 4323.3,4133.8 4325.6,4133.7 4330.4,4133.9 4335.2,4134.3 4339.6,4134.9 4343.5,4135.3 4346.4,4135.4 4308.8,4097.8 4308.9,4100.7 4309.4,4104.6 4309.9,4109 4310.4,4113.8 4310.5,4118.6 4310.4,4120.9 4310.2,4123.1 4309.7,4125.1 4309.1,4127 4308.2,4128.7
  region net SDA: 4613.6,4062.4 4606.6,4069.4 4607.4,4079.8 4608.8,4102.2 4646.4,4064.6 4624,4063.2
  region net SCL: 4579.1,4048 4586.2,4055.1 4587.7,4054.1 4590,4053.1 4592.5,4052.4 4595,4052 4582.2,4039.2 4581.9,4041.7 4581.1,4044.3 4580.2,4046.5
  region net TXD: 4474.2,3208.7 4464.2,3208.7 4463.9,3210.5 4463,3212.7 4461.7,3215.1 4460.2,3217.1 4478.2,3217.1 4476.7,3215.1 4475.5,3212.7 4474.6,3210.5
  region net RXD: 4504.2,3208.7 4494.2,3208.7 4493.9,3210.5 4493,3212.7 4491.7,3215.1 4490.2,3217.1 4508.2,3217.1 4506.7,3215.1 4505.5,3212.7 4504.6,3210.5
  region net PIN_UP: 4749.7,3678.3 4742.6,3685.4 4743.6,3686.9 4744.6,3689.2 4745.3,3691.7 4745.7,3694.2 4758.4,3681.4 4756,3681.1 4753.4,3680.3 4751.2,3679.4
  region net PIN_UP: 4760.2,3713.7 4770.2,3702.4 4770.1,3699.9 4769.9,3697.5 4769.7,3694 4756.1,3705.3 4756.9,3705.6 4757.6,3706.2 4758.3,3707.1 4758.9,3708.2 4759.4,3709.4 4759.8,3710.8 4760.1,3712.3
  region net PIN_DOWN: 4739.7,3490 4739.7,3500 4741.6,3500.3 4743.8,3501.3 4746.2,3502.5 4748.2,3504 4748.2,3486 4746.2,3487.5 4743.8,3488.7 4741.6,3489.7
  region net GND: 4149.2,3966.3 4159.2,3966.3 4159.6,3964.5 4160.5,3962.3 4161.7,3959.9 4163.2,3957.9 4145.2,3957.9 4146.7,3959.9 4148,3962.3 4148.9,3964.5
  region net GND: 4319.7,4131.6 4318,4119.2 4317,4120 4315.9,4120.6 4314.7,4121.2 4313.4,4121.6 4312,4121.9 4310.8,4122 4309.6,4121.9 4308.6,4121.7 4314.8,4138.6 4317.2,4134.7 4318.6,4132.9
  region net GND: 4290.6,3115 4290.6,3105 4288.8,3104.7 4286.5,3103.7 4284.2,3102.5 4282.2,3101 4282.2,3119 4284.2,3117.5 4286.5,3116.3 4288.8,3115.3
Bottom Layer:
  region net SCL: 4586.2,4024.9 4579.1,4032 4580.2,4033.5 4581.1,4035.7 4581.9,4038.3 4582.2,4040.8 4595,4028 4592.5,4027.6 4590,4026.9 4587.7,4025.9
  region net SDA: 4580.8,4061.2 4578.7,4073.2 4579.8,4074.5 4581.1,4076.3 4583.5,4080.4 4590.2,4063.7 4589.2,4063.9 4588,4064 4586.7,4063.8 4585.4,4063.6 4582.8,4062.6 4581.7,4061.9
  region net SDA: 4258.1,3862.2 4258.1,3852.2 4256.3,3851.9 4254,3851 4251.7,3849.7 4249.7,3848.2 4249.7,3866.2 4251.7,3864.8 4254,3863.5 4256.3,3862.6
  region net SCL: 4258.1,3830.7 4258.1,3820.7 4256.3,3820.4 4254,3819.5 4251.7,3818.2 4249.7,3816.7 4249.7,3834.8 4251.7,3833.3 4254,3832 4256.3,3831.1
  region net RXD: 4258.1,3767.8 4258.1,3757.8 4256.3,3757.4 4254,3756.5 4251.7,3755.2 4249.7,3753.8 4249.7,3771.8 4251.7,3770.3 4254,3769 4256.3,3768.1
  region net TXD: 4258.1,3736.3 4258.1,3726.3 4256.3,3725.9 4254,3725 4251.7,3723.7 4249.7,3722.3 4249.7,3740.3 4251.7,3738.8 4254,3737.5 4256.3,3736.6
  region net TXD: 4464.2,3241.3 4474.2,3241.3 4474.6,3239.5 4475.5,3237.3 4476.7,3234.9 4478.2,3232.9 4460.2,3232.9 4461.7,3234.9 4463,3237.3 4463.9,3239.5
  region net RXD: 4494.2,3241.3 4504.2,3241.3 4504.6,3239.5 4505.5,3237.3 4506.7,3234.9 4508.2,3232.9 4490.2,3232.9 4491.7,3234.9 4493,3237.3 4493.9,3239.5
  region net PIN_DOWN: 4603.1,3799.3 4603.1,3789.3 4601.3,3788.9 4599,3788 4596.7,3786.7 4594.7,3785.2 4594.7,3803.3 4596.7,3801.8 4599,3800.5 4601.3,3799.6
  region net PIN_UP: 4603.1,3767.8 4603.1,3757.8 4601.3,3757.4 4599,3756.5 4596.7,3755.2 4594.7,3753.8 4594.7,3771.8 4596.7,3770.3 4599,3769 4601.3,3768.1
  region net PIN_OK: 4320.4,3646 4327.4,3653.1 4329,3652.1 4331.2,3651.1 4333.8,3650.4 4336.2,3650 4323.5,3637.2 4323.1,3639.7 4322.4,3642.3 4321.4,3644.5
  region net PIN_UP: 4742.6,3701.4 4749.7,3708.5 4751.2,3707.5 4753.4,3706.5 4756,3705.8 4758.4,3705.4 4745.7,3692.7 4745.3,3695.1 4744.6,3697.7 4743.6,3699.9
  region net PIN_DOWN: 4764.1,3510.1 4771.2,3503 4770.2,3501.5 4769.2,3499.3 4768.5,3496.7 4768.1,3494.2 4755.3,3507 4757.8,3507.4 4760.4,3508.1 4762.6,3509.1
  region net PIN_OK: 4540.7,3590 4540.7,3600 4542.5,3600.3 4544.8,3601.3 4547.1,3602.5 4549.1,3604 4549.1,3586 4547.1,3587.5 4544.8,3588.7 4542.5,3589.7
  region net $1N1542: 4205.3,3784.3 4198.2,3791.3 4199.2,3792.9 4200.2,3795.1 4200.9,3797.7 4201.3,3800.1 4214,3787.4 4211.6,3787 4209,3786.3 4206.8,3785.3
  region net $1N1542: 4204.9,3122.8 4209.4,3113.1 4208.4,3111.8 4207.3,3109.7 4206.3,3107.4 4205.5,3105 4195.7,3120.1 4196.8,3120 4198.1,3120.1 4200.7,3120.6 4203.1,3121.5 4204.1,3122.1
  text "1.0" at 4689.2,3285 h39.4

## Silkscreen, mask and mechanical layers (free items; w line width, h text height)
Bottom Silkscreen Layer:
  region: 4794.7,3423.5 4794.7,3305.4 4912.8,3305.4 4912.8,3423.5
  text "Cufo-cxy / 2026/07/05 / Rev" at 4774.2,3290 h39.4
  text "GND" at 4374.2,3175 h39.4
  text "TXD" at 4474.2,3175 h39.4
  text "RXD" at 4574.2,3175 h39.4
  text "VCC" at 4679.2,3175 h39.4